# Altium PCB rpi_pico_2_hat.PcbDoc (part 2 of 2)
Units mil, origin at the board's own origin, x right, y up, seen from the top; angles counter-clockwise.
Board outline 970.71 x 2205.08 mil, 4 copper layers (Top Layer, Ground Plane, Middle Layer, Bottom Layer), stack 61.368 mil thick; 73 components, 64 nets, 231 pads, 151 vias.
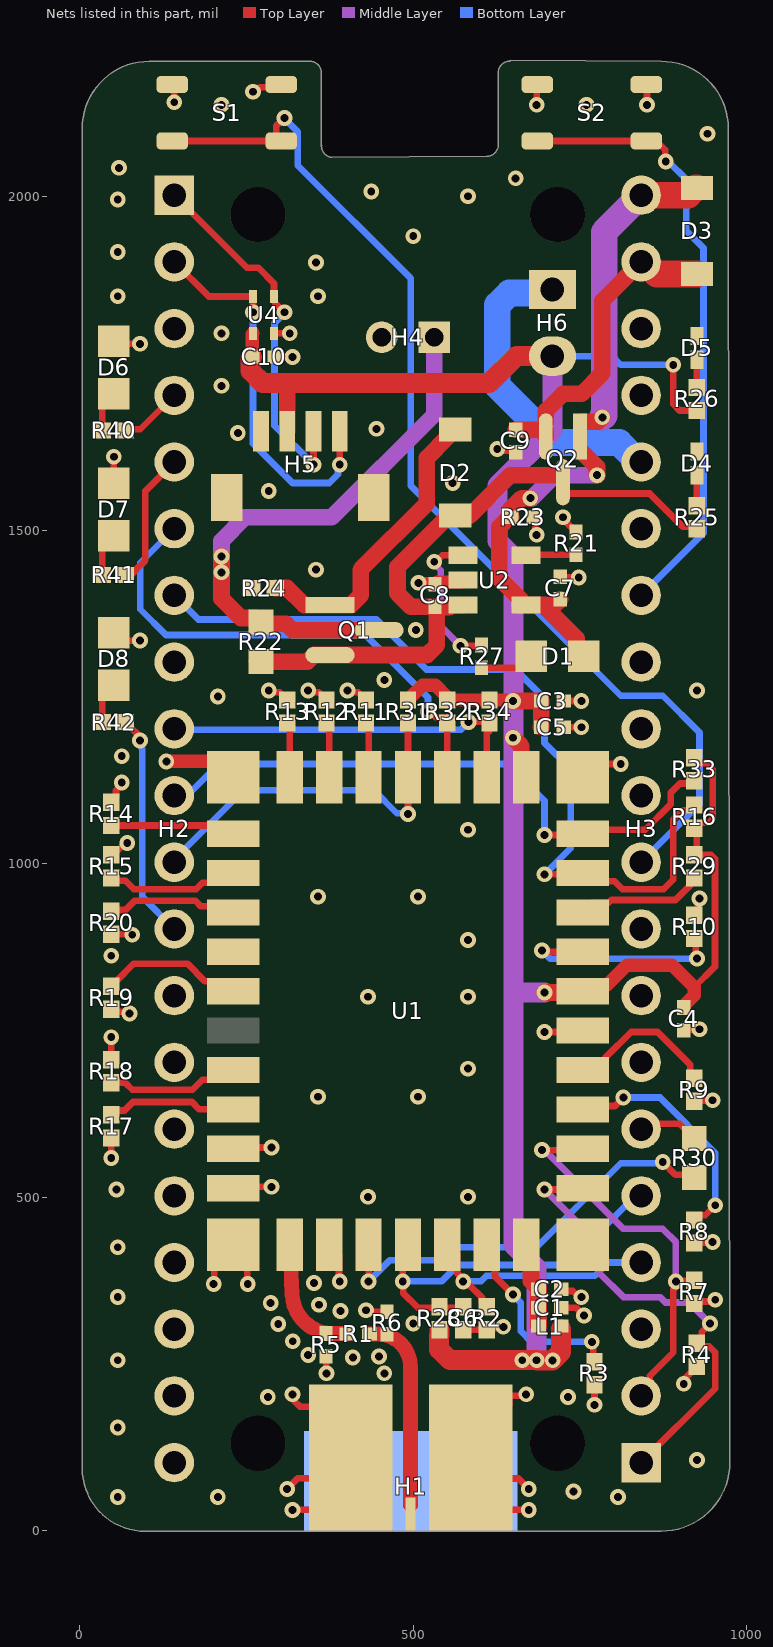
[diagram p4: the nets of this part, all layers, seen from the top]

## Via types
v1: diameter 23.62, hole 11.81, Top Layer to Bottom Layer, tented both sides, 151 vias

## Nets (pads, with @x,y where several pads share a name; then routed paths per layer and width w, separated by ;. In a path a pad name is that pad's centre, name@x,y a point inside that pad or via, vN(x,y) a via of type N, cw(c..) or ccw(c..) an arc to the next point about the centre after c; other vN are vias at no path point)
+3V3: C3.1 C4.1 C5.1 C10.2 H5.3 H6.2 L1.2 R16.1 R26.1 R28.1 R29.1 R31.1 R32.1 R33.1 R34.1 U1.19 U1.25 U4.3 | length 3788.8
  Top Layer w10: v1(889.76,1748.03) 889.76,1688.98 899.21,1679.53 R26.1@925.2,1679.53 ; 921.26,814.96 952.44,846.14 952.44,1007.53 946.58,1013.39 925.2,1013.39 925.2,1054.33 932.4,1061.54 942.96,1061.54 948.82,1067.39 948.82,1141.73 939.49,1151.06 932.4,1151.06 925.2,1158.27 R33.1@925.2,1159.06
  Top Layer w20: C10.2@258.59,1759.84 258.59,1794.02 U4.3@259.84,1795.28 ; R31.1@492.13,1245.67 492.13,1246.46 494.33,1248.66 495.12,1248.66 514.17,1267.72 533.32,1267.72 R32.1@548.98,1252.06 ; R32.1@551.18,1245.67 R34.1@614.17,1245.67 647.05,1245.67 648.63,1244.09 v1(649.61,1244.09) ; U1.25@781.31,809.06 781.31,816.74 783.31,818.74 790.99,818.74 820.14,847.89 888.33,847.89 921.26,814.96 921.26,803.15 905.51,787.4 C4.1@905.51,784.72
  Top Layer w25: H5.3@311.02,1648.62 311.02,1720.47 ; v1(649.61,1188.98) 662.11,1176.48 662.11,1137.11 U1.19@669.29,1129.92 ; v1(649.61,1244.09) C3.1@691.66,1244.09 C5.1@691.66,1204.72 ; v1(696.85,807.09) 751.97,807.09 U1.25@753.94,809.06 761.12,816.24 U1.25@781.77,816.24
  Top Layer w30: C10.2@258.59,1759.84 255.91,1757.16 255.91,1738.81 274.25,1720.47 311.02,1720.47 614.17,1720.47 654.72,1761.02 H6.2@708.66,1761.02 ; R28.1@539.07,301.08 539.07,293.34 538.73,293 538.73,272.29 555.12,255.91 v1(663.39,255.91) v1(685.04,255.91) 685.26,255.69 v1(709.04,255.69) 721.72,268.37 L1.2@721.72,302.41
  Middle Layer w30: v1@650.05,1188.53 650.05,807.11 ; v1@650.05,1189.42 v1@650.05,1243.65 ; v1@650.05,1244.54 650.05,1460.66 626.43,1484.28 626.43,1567.37 709.11,1650.05 H6.2@709.11,1760.58 ; v1@685.04,256.38 685.04,394.17 650.05,429.16 650.05,807.11 ; v1@696.82,807.11 650.05,807.11
  Bottom Layer w10: H6.2@708.66,1761.02 798.03,1761.02 811.02,1748.03 v1(889.76,1748.03)
+3V3_PICO_OUT: H3.16 H6.1 | length 476.5
  Bottom Layer w40: H6.1@708.66,1861.02 703.38,1855.74 644.13,1855.74 625.98,1837.59 625.98,1716.54 711.04,1631.48 808.74,1631.48 837.87,1602.36 H3.16@841.7,1602.36
+5V: C7.1 D1.A D3.A H3.20 Q2.1 R23.1 U2.4 | length 1007.7
  Top Layer w25: R23.1@647.1,1519.68 R23.1@643.78,1519.68 ; v1(675.57,1548.18) 662.44,1548.18 643.78,1529.53 R23.1@643.78,1519.68 ; 695.18,1387.5 703.38,1379.3 744.78,1337.89 744.78,1322.15 D1.A@755.91,1311.02 ; C7.1@720.47,1396.39 712.18,1388.09 695.18,1388.09 669.59,1388.09 U2.4@669.29,1387.8 660.43,1387.8 660.14,1388.09 660.14,1396.95 629.14,1427.95 629.14,1505.04 R23.1@643.78,1519.68 ; Q2.1@752.22,1618.33 775.59,1594.95 v1(775.59,1582.68) ; Q2.1@752.22,1662.82 776.99,1662.82 v1(783.46,1669.29)
  Top Layer w40: H3.20@841.7,2002.36 912.24,2002.36 923.27,2013.39 D3.A@925.2,2013.39
  Middle Layer w25: v1(675.57,1548.18) 678.11,1548.18 712.6,1582.68 v1(775.59,1582.68)
  Middle Layer w40: v1(783.46,1669.29) 786.18,1672 786.18,1946.83 H3.20@841.7,2002.36
ANT: R1.1 R5.1 U1.38 | length 189.3
  Top Layer w22.3: U1.38@314.96,429.13 316.31,400.76 318.52,354.19 ccw(c379.65,356.97) R5.1@369.34,296.65 ; R5.1@369.24,296.06 398.42,296.06 cw(c398.42,293.37) R1.1@400.32,295.28
BAT_POS: H4.1 Q1.3 R22.1 | length 850.9
  Top Layer w25: v1(212.6,1460.63) v1(212.6,1437.01) 212.6,1397.64 241.83,1368.41 265.45,1368.41 R22.1@271.65,1362.2 ; R22.1@274.69,1359.7 309.59,1359.7 318.9,1350.39 Q1.3@424.42,1350.39
  Middle Layer w25: v1(212.6,1437.01) v1(212.6,1460.63) 212.6,1484.25 248.03,1519.68 377.95,1519.68 531.5,1673.23 H4.1@531.5,1789.37
BAT_VOUT: C8.1 D2.K Q1.2 Q2.3 R22.2 R25.1 U2.3 | length 1021.2
  Top Layer w10: Q2.3@722.19,1582.68 722.19,1562.22 729.29,1555.12 854.33,1555.12 903.85,1505.6 921.96,1505.6 R25.1@925.2,1502.36
  Top Layer w25: R22.2@265.45,1303.15 341.4,1303.15 351.24,1312.99 520.79,1312.99 535.43,1327.64 535.43,1372.76 ; C8.1@532.69,1385.3 496.59,1385.3 476.38,1405.51 476.38,1444.88 548.13,1516.63 557.58,1516.63 D2.K@562.99,1522.05 584.84,1522.05 645.47,1582.68 Q2.3@722.19,1582.68 ; C8.1@535.43,1384.57 554.81,1384.57 557.74,1387.5 574.51,1387.5 U2.3@574.8,1387.8
GND: C1.2 C2.2 C3.2 C4.2 C5.2 C6.2 C7.2 C8.2 C9.1 C10.1 D4.K D5.K D6.K D7.K D8.K H1.2 H2.3 H2.8 H2.13 H2.18 H3.3 H3.8 H3.13 H3.18 H4.2 H5.4 H5.5 H5.6 R2.1 R3.1 R4.1 R5.2 R6.2 R7.1 R8.1 R9.1 R10.1 R11.1 R12.1 R13.1 R14.1 R15.1 R17.2 R18.2 R19.2 R20.2 R21.2 R23.2 R24.2 S1.3 S1.4 S2.3 S2.4 U1.1 U1.2 U1.3 U1.12 U1.20 U1.26 U1.31 U1.37 U2.2 U4.4 | length 2568.3
  Top Layer w10: v1(47.24,559.06) R17.2@47.24,588.98 ; R18.2@47.24,706.3 v1(47.24,740.16) ; R19.2@47.24,781.89 50.94,778.2 72.2,778.2 v1(74.8,775.59) ; R20.2@47.24,894.49 47.51,894.22 78.22,894.22 v1(78.74,893.7) ; R15.1@47.24,1013.39 47.24,1014.17 54.45,1021.38 58.54,1021.38 68.27,1031.11 v1(71.21,1031.11) ; R14.1@47.24,1092.13 54.45,1099.33 54.45,1109.82 62.99,1118.36 v1(62.99,1122.05) ; D8.K@51.18,1346.46 62.99,1334.65 v1(90.55,1334.65) ; D7.K@51.18,1570.87 v1(51.18,1610.24) ; D6.K@51.18,1783.46 55.12,1779.53 v1(90.55,1779.53) ; S1.4@138.78,2168.31 141.73,2165.35 v1(141.73,2141.73) ; v1(200.79,370.08) 201.7,370.99 201.7,400.52 U1.1@230.31,429.13 251.06,408.39 251.06,370.99 v1(251.97,370.08) ; U1.2@230.31,513.78 232.28,515.75 v1(287.4,515.75) ; U1.3@230.31,572.83 232.28,574.8 v1(287.4,574.8) ; v1(259.84,2157.48) 263.53,2157.48 270.13,2164.08 297.94,2164.08 S1.3@302.17,2168.31 ; v1(283.46,1259.84) 286.07,1257.24 299.46,1257.24 303.03,1253.66 303.82,1253.66 311.02,1246.46 R13.1@311.02,1245.67 ; U4.4@291.34,1795.28 v1(314.96,1795.28) ; C10.1@292.59,1759.84 v1(318.9,1759.84) ; v1(311.02,62.99) 326.77,78.74 375,78.74 H1.2@406.06,109.8 ; v1(318.9,31.5) 348.56,31.5 406.06,89 H1.2@406.06,109.8 ; v1(318.9,204.72) 321.5,202.12 321.5,195.04 330.18,186.37 348.56,186.37 406.06,128.87 H1.2@406.06,109.8 ; v1(342.52,1259.84) 345.13,1257.24 358.51,1257.24 362.09,1253.66 362.87,1253.66 370.08,1246.46 R12.1@370.08,1245.67 ; R5.2@369.24,262.06 369.66,261.64 369.66,236.64 v1(370.08,236.22) ; U1.37@374.02,429.13 388.7,414.45 388.7,375.08 v1(389.76,374.02) ; v1(401.57,1259.84) 404.18,1257.24 417.57,1257.24 421.14,1253.66 421.93,1253.66 429.13,1246.46 R11.1@429.13,1245.67 ; v1(429.13,330.71) 431.14,328.7 R6.2@460.71,328.7 ; C6.2@574.8,301.57 R2.1@610.24,301.57 612.4,303.74 632.88,303.74 v1(635.04,305.9) ; v1(625.98,1622.05) 628.58,1619.45 650.95,1619.45 C9.1@653.54,1616.86 ; v1(669.29,204.72) 667.34,202.77 643.56,202.77 643.56,187.02 586.06,129.52 H1.2@586.06,109.8 ; v1(673.23,31.5) 643.56,31.5 586.06,89 H1.2@586.06,109.8 ; v1(673.23,62.99) 657.7,78.52 617.35,78.52 H1.2@586.06,109.8 ; R23.2@681.1,1519.68 683.07,1517.72 683.07,1495.17 v1(685.04,1493.2) ; v1(685.04,2137.8) 685.04,2167.32 S2.4@686.02,2168.31 ; v1(696.85,748.03) 751.97,748.03 U1.26@753.94,750 ; C7.2@720.47,1430.39 721.1,1429.76 747.41,1429.76 v1(748.03,1429.13) ; C1.2@721.72,334.65 743.76,334.65 755.57,322.83 v1(755.91,322.83) ; C2.2@721.72,362.2 724.28,359.65 739.03,359.65 748.28,350.39 v1(751.97,350.39) ; v1(724.41,1519.47) 724.41,1517 738.09,1503.32 739.09,1503.32 744.09,1498.32 R21.2@744.09,1497.32 ; C5.2@725.66,1204.72 v1(751.97,1204.72) ; C3.2@725.66,1244.09 v1(751.97,1244.09) ; U1.20@753.94,1129.92 773.62,1149.61 v1(811.02,1149.61) ; v1(771.65,188.98) R3.1@771.65,218.9 ; S2.3@849.41,2168.31 850.39,2167.32 v1(850.39,2137.8) ; v1(905.51,220.47) 908.12,223.08 908.12,229.38 917.2,238.46 917.99,238.46 925.2,245.67 R4.1@925.2,246.46 ; C4.2@905.51,750.72 906.14,751.34 928.51,751.34 v1(929.13,751.97) ; R7.1@921.26,340.94 924.17,343.85 950.15,343.85 v1(952.76,346.46) ; R8.1@921.26,431.5 922.05,432.28 948.03,432.28 v1(948.82,433.07) ; R9.1@921.26,644.09 922.05,644.88 948.03,644.88 v1(948.82,645.67) ; R10.1@921.26,922.83 926.53,928.1 926.53,945.33 v1(929.13,947.94)
  Top Layer w20: v1(129.92,1153.54) 206.69,1153.54 U1.12@230.31,1129.92 ; v1(507.87,1421.26) 508.85,1421.26 509.82,1420.3 C8.2@532.69,1420.3 ; C8.2@532.69,1419.3 C8.2@532.69,1420.3 ; U2.2@574.8,1425.2 572.01,1422.4 535.79,1422.4 533.69,1420.3 C8.2@532.69,1420.3
  other v1: 57.09,50.79 207.09,50.79 807.09,50.79 740.16,59.06 925.2,106.3 57.09,155.05 282.09,200.79 732.09,200.79 456.69,236.22 57.09,255.91 409.45,259.84 448.6,261.36 342.52,263.78 319.31,284.33 297.66,310.05 500,311.02 391.02,329.52 358.79,339.06 286.27,341.68 57.09,350.79 351.18,371.81 57.09,425.2 432.09,500.79 582.09,500.79 55.12,511.81 357.09,650.79 507.09,650.79 582.09,692.91 432.09,800.79 582.09,800.79 47.24,862.2 582.09,885.83 357.09,950.79 507.09,950.79 582.09,1051.18 62.99,1161.42 207.09,1250.79 925.2,1259.84 456.69,1275.59 503.94,1350.39 354.33,1440.94 283.46,1559.06 559.06,1570.87 237.03,1645.67 444.92,1652.08 212.6,1716.54 212.6,1795.28 57.09,1850.79 357.09,1850.79 354.33,1901.57 57.09,1917.32 500,1940.94 57.09,1996.06 582.09,2000.79 437.01,2007.87 653.54,2027.56 59.06,2043.31 940.94,2094.49 212.6,2137.8 759.84,2137.8
HALOW_RESET_N: C6.1 H3.5 R28.2 U1.35 | length 590.5
  Top Layer w10: U1.35@492.13,429.13 484.25,421.26 v1(484.25,374.02) 484.79,373.48 484.79,356.64 506.78,334.65 C6.1@579.61,334.65
  Bottom Layer w10: v1(484.25,374.02) 542.54,374.02 567.1,398.57 729.28,398.57 833.07,502.36 H3.5@841.7,502.36
I2C_SCL: H2.2 H5.1 U4.2 | length 583.1
  Top Layer w10: H2.2@141.7,1902.36 193.67,1850.39 U4.2@259.84,1850.39 v1(259.84,1826.77) ; v1(389.76,1598.43) H5.1@389.76,1648.62
  Bottom Layer w10: v1(259.84,1826.77) 259.84,1629.92 318.9,1570.87 374.02,1570.87 387.16,1584.01 387.16,1595.82 v1(389.76,1598.43)
I2C_SDA: H2.1 H5.2 U4.1 | length 563.1
  Top Layer w10: H2.1@141.7,2002.36 250.36,1893.7 267.72,1893.7 291.34,1870.08 U4.1@291.34,1850.39 292.24,1849.49 292.24,1841.61 v1(307.09,1826.77) ; v1(350.39,1598.43) H5.2@350.39,1648.62
  Bottom Layer w10: v1(307.09,1826.77) 307.09,1825.91 292.15,1810.98 292.15,1656.67 v1(350.39,1598.43)
MM_BUSY: H3.4 R2.2 U1.34 | length 398.3
  Top Layer w10: U1.34@551.18,429.13 565.87,414.45 565.87,386.64 574.8,377.7 v1(574.8,374.02) 578.49,374.02 585.3,367.2 585.55,367.2 603.03,349.72 603.03,343.43 R2.2@610.24,336.22
  Bottom Layer w10: v1(574.8,374.02) 575.12,374.34 601.61,374.34 609.85,382.57 772.33,382.57 792.12,402.36 H3.4@841.7,402.36
MM_GPIO_1: R3.2 U1.33 | length 295.5
  Top Layer w10: U1.33@610.24,429.13 622.65,416.72 622.65,381.28 v1(649.61,354.33) ; v1(767.72,283.46) 769.68,281.5 769.68,255.51 R3.2@771.65,253.54
  Bottom Layer w10: v1(649.61,354.33) 649.61,353.47 661.42,341.66 661.42,299.21 677.17,283.46 v1(767.72,283.46)
MM_GPIO_4: R8.2 U1.28 | length 359.8
  Top Layer w10: U1.28@753.94,631.89 759.14,637.09 802.45,637.09 v1(814.96,649.61) ; R8.2@921.26,466.14 928.28,473.16 937.72,473.16 v1(952.76,488.19)
  Bottom Layer w10: v1(814.96,649.61) 870.08,649.61 952.76,566.93 v1(952.76,488.19)
MM_GPIO_5: R9.2 U1.27 | length 236.4
  Top Layer w10: U1.27@753.94,690.94 773.62,690.94 788.31,705.63 788.31,709.57 826.77,748.03 866.14,748.03 915.14,699.03 915.14,673.05 R9.2@917.24,670.95
MM_GPIO_6: R10.2 U1.24 | length 331.2
  Top Layer w10: v1(692.91,870.08) 694.88,868.11 U1.24@753.94,868.11 ; R10.2@921.26,888.19 923.35,886.1 923.35,860.11 v1(925.2,858.27)
  Bottom Layer w10: v1(692.91,870.08) 693.02,870.08 705.58,857.52 924.45,857.52 v1(925.2,858.27)
MM_GPIO_7: R11.2 U1.15 | length 82.7
  Top Layer w10: R11.2@429.13,1211.02 433.07,1207.09 U1.15@433.07,1129.92
MM_GPIO_8: R12.2 U1.14 | length 82.7
  Top Layer w10: R12.2@370.08,1211.02 374.02,1207.09 U1.14@374.02,1129.92
MM_GPIO_9: R13.2 U1.13 | length 82.7
  Top Layer w10: R13.2@311.02,1211.02 314.96,1207.09 U1.13@314.96,1129.92
MM_GPIO_10: R14.2 U1.11 | length 188.1
  Top Layer w10: R14.2@47.24,1057.48 218.11,1057.48 U1.11@230.31,1045.28
MM_JTAG_TCK: R17.1 U1.4 | length 195.6
  Top Layer w10: R17.1@47.24,623.62 53.76,630.13 67.14,630.13 79.89,642.89 168.14,642.89 179.13,631.89 U1.4@230.31,631.89
MM_JTAG_TDI: R18.1 U1.5 | length 191.7
  Top Layer w10: R18.1@55.12,671.65 68.5,671.65 78.74,661.42 169.29,661.42 184.43,676.56 215.93,676.56 U1.5@230.31,690.94
MM_JTAG_TDO: R20.1 U1.9 | length 196.9
  Top Layer w10: R20.1@47.24,929.13 48.91,930.8 68.59,930.8 82.68,944.88 173.23,944.88 181.8,936.31 221.17,936.31 U1.9@230.31,927.17
MM_JTAG_TMS: R19.1 U1.7 | length 214.7
  Top Layer w10: R19.1@47.24,816.54 47.24,817.32 54.45,824.53 55.24,824.53 81.1,850.39 161.42,850.39 188.07,823.74 215.63,823.74 U1.7@230.31,809.06
MM_JTAG_TRST_N: U1.8
MM_SDIO_D2: R29.2 U1.23 | length 193.1
  Top Layer w10: U1.23@753.94,927.17 768.62,941.85 793.13,941.85 797.11,945.83 893.08,945.83 925.2,977.95 R29.2@925.2,978.74
MM_SPI_CS: H2.7 R16.2 U1.22 | length 1260
  Top Layer w10: v1(696.85,984.25) 751.97,984.25 U1.22@753.94,986.22 766.35,973.8 801.79,973.8 813.76,961.83 875.22,961.83 889.76,976.38 889.76,1066.7 903.26,1080.2 917.2,1080.2 R16.2@925.2,1088.19
  Bottom Layer w10: H2.7@141.7,1402.36 177.92,1366.14 444.88,1366.14 519.69,1291.34 653.54,1291.34 696.85,1248.03 696.85,1181.1 736.22,1141.73 736.22,1023.62 v1(696.85,984.25)
MM_SPI_INT: H2.11 R31.2 U1.16 | length 548.4
  Top Layer w10: v1(492.13,1074.8) R31.2@492.13,1211.02
  Bottom Layer w10: H2.11@141.7,1002.36 141.7,1006.38 245.56,1110.24 440.94,1110.24 475.29,1075.89 491.04,1075.89 v1(492.13,1074.8)
MM_SPI_MISO: H2.6 R32.2 U1.17 | length 775.4
  Top Layer w10: v1(521.61,1228.35) 524.95,1228.35 534.28,1219.02 543.98,1219.02 R32.2@551.18,1211.81 ; U1.17@551.18,1129.92 R32.2@551.18,1219.69
  Bottom Layer w10: H2.6@141.7,1502.36 90.76,1451.41 90.76,1381.68 129.36,1343.08 428.57,1343.08 522.09,1249.56 522.09,1228.83 v1(521.61,1228.35)
MM_SPI_MOSI: H2.10 R33.2 U1.21 | length 920.6
  Top Layer w10: v1(696.85,1043.31) 751.97,1043.31 U1.21@753.94,1045.28 759.84,1051.18 847.84,1051.18 885.83,1089.17 885.83,1106.3 899.91,1120.39 921.17,1120.39 R33.2@925.11,1124.32
  Bottom Layer w10: H2.10@141.7,1102.36 151.09,1111.75 170.8,1111.75 208.66,1149.61 641.73,1149.61 696.85,1094.49 v1(696.85,1043.31)
MM_SPI_SCK: H2.9 R34.2 U1.18 | length 548.4
  Top Layer w10: v1(582.68,1212.6) 583.19,1213.12 612.08,1213.12 R34.2@614.17,1211.02 ; U1.18@610.24,1129.92 610.24,1195.28 R34.2@614.17,1199.21
  Bottom Layer w10: H2.9@141.7,1202.36 143.28,1200.79 571.12,1200.79 578.99,1208.66 v1@582.68,1208.66
MM_WAKE: R30.1 U1.36 | length 622.5
  Top Layer w10: v1(433.07,374.02) U1.36@433.07,429.13 ; v1(874.02,553.15) 893.42,533.75 917.04,533.75 R30.1@921.26,529.53
  Bottom Layer w10: v1(433.07,374.02) 464.57,405.51 535.43,405.51 555.12,425.2 685.04,425.2 811.02,551.18 v1@870.08,551.18
NetC1_1: C1.1 C2.1 L1.1 U1.32 | length 129.7
  Top Layer w25: U1.32@669.29,429.13 676.48,421.95 676.48,374.7 687.72,363.46 C2.1@687.72,362.2 C1.1@687.72,334.65 L1.1@687.72,307.09
NetD1_K: D1.K R27.1 | length 81.8
  Top Layer w10: R27.1@602.36,1294.02 660.17,1294.02 D1.K@677.17,1311.02
NetD2_A: D2.A Q1.1 R24.1 | length 460.6
  Top Layer w25: R24.1@292.91,1413.39 311.02,1413.39 336.61,1387.8 Q1.1@375.19,1387.8 406.62,1387.8 421.26,1402.44 421.26,1440.94 520.48,1540.16 520.48,1608.67 551.48,1639.67 551.48,1645.77 556.89,1651.18 D2.A@562.99,1651.18 ; D2.A@567.81,1646.36 D2.A@571.06,1649.61
NetD4_A: D4.A R25.2 | length 45.7
  Top Layer w10: R25.2@925.2,1537.01 D4.A@925.2,1582.68
NetD5_A: D5.A R26.2 | length 41.7
  Top Layer w10: R26.2@925.2,1714.17 D5.A@925.2,1755.91
NetD6_A: D6.A R40.2 | length 62.2
  Top Layer w10: R40.2@33.99,1649.61 33.99,1687.54 D6.A@51.18,1704.72
NetD7_A: D7.A R41.2 | length 66.2
  Top Layer w10: R41.2@33.99,1433.07 33.99,1474.94 D7.A@51.18,1492.13
NetD8_A: D8.A R42.2 | length 62.2
  Top Layer w10: R42.2@33.99,1212.6 33.99,1250.53 D8.A@51.18,1267.72
NetH1_1: H1.1 R1.2 R6.1 | length 297
  Top Layer w22.3: R1.2@434.32,295.28 446.23,295.28 cw(c446.23,245.45) 496.06,245.45 H1.1@496.06,38.65
NetR15_2: R15.2 U1.10 | length 200.2
  Top Layer w10: R15.2@47.24,978.74 51.27,974.72 68.59,974.72 81.48,961.83 174.43,961.83 184.43,971.83 215.93,971.83 U1.10@230.31,986.22
NetR21_1: R21.1 U2.5 | length 86.6
  Top Layer w10: U2.5@661.57,1462.89 686.36,1462.89 686.78,1463.32 R21.1@748.03,1463.32
NetR27_2: R27.2 U2.1 | length 221.7
  Top Layer w10: v1(531.5,1452.76) 533.8,1452.76 543.65,1462.6 U2.1@574.8,1462.6 ; v1(570.87,1326.77) 601.11,1326.77 R27.2@602.36,1328.02
  Middle Layer w10: v1(531.5,1452.76) 531.5,1449.9 541.31,1440.09 541.31,1356.33 v1(570.87,1326.77)
PICO_3V3_EN: H3.17
PICO_ADC_REF: H3.15
PICO_GP10: H2.14
PICO_GP11: H2.15
PICO_GP12: H2.16
PICO_GP13: H2.17
PICO_GP14: H2.19
PICO_GP15: H2.20
PICO_GP21: H3.7
PICO_GP22: H3.9
PICO_GP26: H3.11
PICO_GP27: H3.12
PICO_RESET: H3.10 S1.1 S1.2 | length 1680.1
  Top Layer w10: S1.2@138.78,2083.66 S1.1@291.34,2083.66 ; S1.1@304.21,2091.35 S1.1@311.9,2083.66 ; v1@304.21,2111.54 307.09,2114.42 v1(307.09,2118.11) 306.23,2118.11 294.42,2106.3 294.42,2086.74 S1.1@291.34,2083.66 ; S1.1@312.24,2083.66 S1.1@311.9,2083.66 ; S1.1@291.34,2083.66 S1.1@302.17,2083.66 S1.1@311.9,2083.66
  Bottom Layer w10: v1(307.09,2118.11) 307.09,2117.25 326.77,2097.57 326.77,2047.24 496.06,1877.95 496.06,1566.93 811.02,1251.97 874.02,1251.97 929.13,1196.85 929.13,1089.79 H3.10@841.7,1002.36
STATUS_LED_B: H2.12 R42.1 | length 341
  Top Layer w10: R42.1@68.64,1212.6 69.43,1212.6 76.63,1205.39 76.63,1204.61 87.94,1193.29 87.94,1187.65 v1(90.55,1185.04)
  Bottom Layer w10: v1(90.55,1185.04) 93.16,1182.43 93.16,1173.23 94.02,1172.37 94.02,950.05 H2.12@141.7,902.36
STATUS_LED_G: H2.5 R41.1 | length 196.8
  Top Layer w10: R41.1@76.51,1433.07 77.3,1433.07 84.5,1440.28 84.5,1441.06 98.43,1454.98 98.43,1559.08 H2.5@141.7,1602.36
STATUS_LED_R: H2.4 R40.1 | length 88
  Top Layer w10: R40.1@76.51,1649.61 76.51,1651.31 76.63,1651.43 90.77,1651.43 H2.4@141.7,1702.36
UART_MM_RX: H3.1 R4.2 U1.30 | length 697
  Top Layer w10: v1(696.85,511.81) 751.97,511.81 U1.30@753.94,513.78 ; H3.1@841.7,102.36 952.76,213.41 952.76,267.72 943.6,276.87 929.43,276.87 R4.2@925.2,281.1 932.4,288.31 932.4,298.35 944.88,310.84 v1(944.88,311.02)
  Middle Layer w10: v1(696.85,511.81) 779.53,429.13 779.53,385.83 814.96,350.39 870.08,350.39 877.95,342.52 913.39,342.52 v1(944.88,311.02)
UART_MM_TX: H3.2 R7.2 U1.29 | length 600.2
  Top Layer w10: v1(692.91,570.87) 751.97,570.87 U1.29@753.94,572.83 ; H3.2@841.7,202.36 841.7,215.63 854.54,228.47 854.54,232.49 889.76,267.72 889.76,361.35 891.09,362.68 891.09,371.41 v1(893.7,374.02) 894.49,374.8 920.47,374.8 R7.2@921.26,375.59
  Middle Layer w10: v1(692.91,570.87) 696.6,570.87 703.41,564.06 703.66,564.06 814.96,452.76 874.02,452.76 893.7,433.07 v1(893.7,374.02)
USER_BUTTON: H3.14 S2.1 S2.2 | length 931.9
  Top Layer w10: S2.2@686.02,2083.66 S2.1@849.41,2083.66 856.34,2076.73 871.07,2076.73 877.79,2070.01 877.79,2053.71 v1(878.6,2052.9)
  Bottom Layer w10: H3.14@841.7,1402.36 935.13,1495.79 935.13,1685.68 936.46,1687.02 936.46,1691.98 935.13,1693.31 936.46,1694.64 936.46,1704.65 935.13,1705.98 935.13,1923.13 909.45,1948.82 909.45,2025.74 882.29,2052.9 v1(878.6,2052.9)
VSYS_PICO: C9.2 D3.K H3.19 Q2.2 | length 460.6
  Top Layer w25: C9.2@653.54,1650.86 696.6,1650.86 698.82,1648.64 Q2.2@698.82,1640.57 ; Q2.2@698.82,1662.82 698.82,1679.17 724.37,1704.72 752.68,1704.72 783.46,1735.5 783.46,1844.12 H3.19@841.7,1902.36
  Top Layer w40: H3.19@841.7,1902.36 846.86,1902.36 854.92,1894.29 864.97,1884.25 D3.K@925.2,1884.25
WAKE: H3.6 R30.2 | length 91.8
  Top Layer w10: H3.6@841.7,602.36 849.58,610.24 899.61,610.24 R30.2@921.26,588.58
pads on no net: M1.1 M2.1 M3.1 M4.1 U1.6

## Polygon pours and split planes (outlines as drawn)
GND on Top Layer "GND_L01_P000" (solid, remove dead copper, pour order 0): 3.84,93.63 3.84,2102.36 cw(c104.56,2102.36) 104.56,2203.08 389.76,2203.08 385.83,2203.08 cw(c384.68,2186.19) 401.57,2185.04 401.57,2078.74 ccw(c418.47,2077.59) 417.32,2060.7 578.74,2060.7 ccw(c578.41,2078.41) 596.13,2078.74 596.13,2187.33 cw(c613.03,2186.19) 614.17,2203.08 871.72,2203.08 cw(c871.72,2102.36) 972.44,2102.36 974.55,102.36 cw(c871.72,102.36) 871.72,-0.46 97.93,-0.46 cw(c97.93,93.63)
GND on Middle Layer "GND_L03_P001" (solid, remove dead copper, pour order 1): 10.04,90.44 10.04,2099.17 cw(c110.76,2099.17) 110.76,2199.89 395.97,2199.89 392.03,2199.89 cw(c390.88,2182.99) 407.78,2181.85 407.78,2075.54 ccw(c424.67,2074.4) 423.52,2057.5 584.94,2057.5 ccw(c584.61,2075.22) 602.33,2075.55 602.33,2184.14 cw(c619.23,2182.99) 620.37,2199.89 877.92,2199.89 cw(c877.92,2099.17) 978.64,2099.17 980.75,99.17 cw(c877.92,99.17) 877.92,-3.66 104.13,-3.66 cw(c104.13,90.44)
GND on Bottom Layer "GND_L04_P002" (solid, remove dead copper, pour order 2): 3.84,93.63 3.84,2102.36 cw(c104.56,2102.36) 104.56,2203.08 389.76,2203.08 385.83,2203.08 cw(c384.68,2186.19) 401.57,2185.04 401.57,2078.74 ccw(c418.47,2077.59) 417.32,2060.7 578.74,2060.7 ccw(c578.41,2078.41) 596.13,2078.74 596.13,2187.33 cw(c613.03,2186.19) 614.17,2203.08 871.72,2203.08 cw(c871.72,2102.36) 972.44,2102.36 974.55,102.36 cw(c871.72,102.36) 871.72,-0.46 97.93,-0.46 cw(c97.93,93.63)
GND on Ground Plane (split plane): 871.58,2182.99 871.65,2182.99 871.72,2182.99 871.72,2183 872.3,2183.05 879.63,2182.69 887.47,2181.53 895.15,2179.6 902.61,2176.93 909.77,2173.55 916.56,2169.48 922.93,2164.76 928.8,2159.44 934.12,2153.57 938.83,2147.21 942.91,2140.41 946.29,2133.25 948.96,2125.79 950.89,2118.11 952.05,2110.27 952.41,2102.99 952.35,2102.36 952.34,2102.36 952.35,2102.35 952.34,2102.34 954.45,102.34 954.51,101.7 954.15,94.24 952.95,86.2 950.98,78.32 948.24,70.67 944.77,63.32 940.59,56.35 935.74,49.82 930.29,43.8 924.26,38.34 917.74,33.5 910.76,29.32 903.42,25.84 895.76,23.1 887.88,21.13 879.84,19.94 872.37,19.57 871.72,19.63 97.93,19.63 97.35,19.58 90.67,19.9 83.48,20.97 76.43,22.74 69.58,25.19 63.01,28.3 56.77,32.03 50.93,36.36 45.55,41.25 40.66,46.63 36.33,52.47 32.6,58.71 29.49,65.28 27.04,72.13 25.27,79.18 24.2,86.37 23.88,93.05 23.93,93.63 23.93,2102.36 23.87,2103 24.23,2110.27 25.39,2118.11 27.32,2125.79 29.98,2133.25 33.37,2140.41 37.44,2147.21 42.16,2153.57 47.48,2159.44 53.35,2164.76 59.71,2169.48 66.51,2173.55 73.67,2176.93 81.13,2179.6 88.81,2181.53 96.65,2182.69 103.92,2183.05 104.56,2182.99 342.11,2182.99 342.11,2074.8 342.17,2074.19 342.15,2073.57 342.36,2072.23 342.49,2070.88 342.67,2070.29 342.77,2069.68 343.24,2068.41 343.25,2068.39 343.66,2066.35 345.21,2061.76 347.35,2057.42 350.04,2053.39 353.24,2049.75 356.88,2046.56 360.9,2043.87 365.24,2041.73 369.83,2040.17 372.91,2039.56 374.16,2039.19 374.17,2039.19 374.18,2039.19 376.1,2039.01 378.08,2038.83 378.09,2038.83 378.1,2038.83 608.98,2040.54 610.08,2040.43 610.15,2040.44 610.23,2040.43 611.3,2040.55 614.7,2040.77 619.57,2041.74 624.27,2043.34 628.73,2045.53 632.86,2048.29 636.59,2051.57 639.87,2055.3 642.62,2059.43 644.82,2063.88 646.42,2068.58 647.39,2073.46 647.71,2078.41 647.7,2078.53 647.72,2078.74 647.72,2183.19 649.46,2183.35 649.52,2183.36 649.59,2183.37 651.41,2183.92 653.23,2184.46 653.24,2184.47

## Other copper
Ground Plane (plane layer: these items are gaps in the copper):
  the board outline again, w40

## Silkscreen, mask and mechanical layers (free items; w line width, h text height)
Top Overlay:
  lines w7.87: 679.8,1581.89 679.8,1605.67
  text "RESET" at 98.43,2062.99 h40 r90
  text "USER" at 923.23,2056.25 h40 r90
  text "QWIIC" at 392.57,1494.09 h40 r180
Bottom Overlay:
  text "RPI PICO 2" at 718.65,1299.21 h70
  text "HALOW HAT" at 748.33,1183.07 h70
  text "V1" at 557.39,1072.83 h70
Top Assembly:
  lines w7.87: 377.95,1744.09 381.89,1740.16 606.3,1740.16 606.3,2035.43 377.95,2035.43 377.95,1744.09 ; 586.61,1366.14 653.54,1366.14 653.54,1484.25 586.61,1484.25 586.61,1366.14
Fab Notes:
  lines w3.94: -58.84,-1054.17 -58.84,-602.42 1478.22,-602.42 1478.22,-1054.62 -58.39,-1054.62 ; 474.62,-1053.22 474.62,-602.42 ; 474.62,-964.17 1479.54,-964.17 ; 474.62,-874.07 1479.54,-874.07 ; 474.62,-783.52 1479.54,-783.52 ; 474.62,-692.97 1479.54,-692.97 ; 1182.3,-1055.61 1182.3,-965.06
  text "NOTES: UNLESS OTHERWISE SPECIFIED0" at -3357.21,2832.86 h60
  text "1. SPECIFICATIONS/TOLERANCES:" at -3357.21,2762.86 h60
  text "A. FABRICATE PER IPC-6012, CLASS 2, USING PROVIDED DATA FILES XXXXXXXX.ZIP" at -3357.21,2692.86 h60
  text "B. ALL SPECIFICATIONS USED SHALL BE PER THEIR LATEST REVISIONS." at -3357.21,2622.86 h60
  text "C. THE DIMENSIONS OF CIRCUIT FEATURES IN THE PROVIDED DATA MAY BE ADJUSTED" at -3357.21,2552.86 h60
  text "ONLY TO COMPENSATE FOR PROCESS TOLERANCES; ADDING, REMOVING OR RELOCATING" at -3357.21,2482.86 h60
  text "CIRCUIT FEATURES IS NOT ALLOWED" at -3357.21,2412.86 h60
  text "D. REMOVE ALL BURRS AND BREAK SHARP EDGES, .381 [.015] MAX RADIUS." at -3357.21,2342.86 h60
  text "E. PARENTHETICAL INFORMATION IS FOR REFERENCE ONLY." at -3357.21,2272.86 h60
  text "F. REPAIR OF PCB DEFECTS IS NOT PERMITTED." at -3357.21,2202.86 h60
  text "2. DIELECTRIC MATERIAL:" at -3357.25,2062.86 h60
  text "A. DIELECTRIC MATERIAL SHALL BE PER IPC-4101/99, /124, /126 OR /129 (RoHS COMPLIANT EPOXY-GLASS)" at -3357.21,1992.86 h60
  text "B. MINIMUM DIELECTRIC THICKNESS SHALL BE .051 [.002] FOR REFERENCED STACK-UP" at -3357.21,1922.86 h60
  text "DIMENSIONS OF.076 [.003] OR GREATER; IPC-6012 REQUIREMENTS SHALL OTHERWISE" at -3357.21,1852.86 h60
  text "APPLY. SINGLE-PLY CONSTRUCTION IS ALLOWED." at -3357.21,1782.86 h60
  text "C. SEE LAYER STACK-UP FOR REQUIRED COPPER WEIGHTS AND THE FINISHED PCB" at -3357.21,1712.86 h60
  text "THICKNESS. IF SPECIFIED, 1/3 OZ. STARTING FOIL MAY BE ACHIEVED BY 1/2 OZ. FOIL REDUCTION." at -3357.21,1642.86 h60
  text "D. FINISHED PCB THICKNESS SHALL BE MEASURED OVER LANDS AND/OR" at -3357.21,1572.86 h60
  text "CONDUCTORS NOT COVERED BY SOLDER MASK. IF SPECIFIED, 1/3 OZ. STARTING FOIL" at -3357.21,1502.86 h60
  text "MAY BE ACHIEVED BY 1/2 OZ. FOIL REDUCTION." at -3357.21,1432.86 h60
  text "3. DRILLING:" at -3357.21,1292.86 h60
  text "A. VIA DIAMETERS SHALL BE VERIFIED BEFORE PLATING; ALL OTHER HOLE" at -3357.21,1222.86 h60
  text "DIAMETERS ARE FINISHED DIMENSIONS." at -3357.21,1152.86 h60
  text "B. LAYER-TO-LAYER MISREGISTRATION SHALL BE .127 [.005] MAXIMUM." at -3357.21,1082.86 h60
  text "4. SOLDER MASK:" at -3357.21,942.86 h60
  text "A. APPLY LPI SOLDER MASK OVER BARE COPPER USING PROVIDED DATA." at -3357.21,872.86 h60
  text "B. SOLDER MASK SHALL BE PER IPC-SM-840, CLASS T, COLOR PURPLE." at -3357.21,802.86 h60
  text "C. THE DIMENSIONS OF SOLDER MASK-DEFINED PADS ON PLANES AND/OR WIDE" at -3357.21,732.86 h60
  text "CONDUCTORS SHALL NOT BE MODIFIED." at -3357.21,662.86 h60
  text "5. SILKSCREEN/MARKING:" at -3357.21,522.86 h60
  text "A. SILKSCREEN PCB PER PROVIDED DATA USING PERMANENT, NON-CONDUCTIVE" at -3357.21,452.86 h60
  text "INK, COLOR WHITE." at -3357.21,382.86 h60
  text "B. SUPPLIER ID AND TRACEABILITY INFORMATION SHALL NOT / BE APPLIED ON ANY PART OF THE PCB" at -3356.19,209.11 h60
  text "C. INK SHALL NOT BE APPLIED TO ANY SOLDERABLE SURFACE." at -3357.21,133.49 h60
  text "USING PROVIDED DATA." at -3357.21,63.49 h60
  text "6. ELECTRICAL TEST:" at -3357.21,-76.51 h60
  text "A. DESIGN VERIFICATION SHALL BE DONE PRIOR TO PCB FABRICATION USING" at -3357.21,-146.51 h60
  text "GERBER DATA AND AN IPC-D-356 NETLIST." at -3357.21,-216.51 h60
  text "B. ALL PCBS SHALL BE 100% ELECTRICALLY TESTED FOR OPENS AND SHORTS" at -3357.21,-286.51 h60
  text "C. APPLY TEST STAMP IN NON-LEGEND AREA ON SECONDARY SIDE OF PCB." at -3357.21,-356.51 h60
  text "7. FINAL FINISH:" at -3357.21,-491.51 h60
  text "A. FINAL FINISH SHALL BE ELECTROLESS NICKEL/IMMERSION GOLD (ENIG) PER IPC-4552." at -3357.21,-565.54 h60
  text "Project:" at 492.34,-665.41 h60
  text "RPI Pico 2 HaLow Hat" at 753.17,-670.33 h80
  text "8. IMPEDANCE:" at -3360.68,-673.63 h60
  text "A. IMPEDANCE TOLERANCE SHALL BE +/- 10%." at -3360.68,-743.63 h60
  text "Company:" at 492.34,-755.96 h60
  text "B. SEE LAYER STACK-UP FOR IMPEDANCE REQUIREMENTS." at -3360.68,-813.63 h60
  text "Drawn By:" at 492.34,-846.51 h60
  text ".DrawnBy" at 753.17,-853.4 h80
  text "9. IF PANELIZATION SPECIFICATIONS ARE PROVIDED, THE PCBS SHALL BE DELIVERED IN PANEL" at -3347.21,-936.51 h60
  text "FORM. HOWEVER, THESE SPECIFICATIONS MAY BE REPLACED BY SUPPLIER PREFERRED" at -3347.21,-1006.51 h60
  text "Date:" at 492.34,-1027.06 h60
  text "Rev:" at 1210.84,-1031 h60
  text "14/09/2024" at 753.17,-1037.89 h80
  text ".Rev" at 1338.8,-1037.89 h80
  text "(SPECIFICATIONS AS APPROVED)." at -3347.21,-1076.51 h60
Board:
  lines w7.87: 972.44,2102.36 974.55,102.36
  lines w10: 362.2,2074.8 362.2,2185.04 ccw(c345.31,2186.19) 346.46,2203.08 104.56,2203.08 ccw(c104.56,2102.36) 3.84,2102.36 ; 362.51,2077.07 ccw(c379.41,2075.93) 377.95,2059.06 ; 377.95,2058.93 610.08,2060.65 ; 610.08,2060.53 ccw(c609.75,2078.41) 627.63,2078.74 627.63,2187.33 cw(c644.52,2186.19) 645.67,2203.08 ; 645.68,2204.62 871.72,2203.08 cw(c871.72,2102.36) 972.44,2102.36 ; 974.55,102.36 cw(c871.72,102.36) 871.72,-0.46 97.93,-0.46 cw(c97.93,93.63) 3.84,93.63 3.84,235.76 3.84,2102.36 ; 3.84,2102.36 3.84,2102.36